# Altium PCB lab_1_pankov_usb_rs232.PcbDoc
Units mm, origin at the board's own origin, x right, y up, seen from the top; angles counter-clockwise.
Board outline 60 x 34 mm, 4 copper layers (Top Layer, Signal Layer 1, Signal Layer 2, Bottom Layer), stack 1.522 mm thick; 29 components, 24 nets, 115 pads, 88 vias.
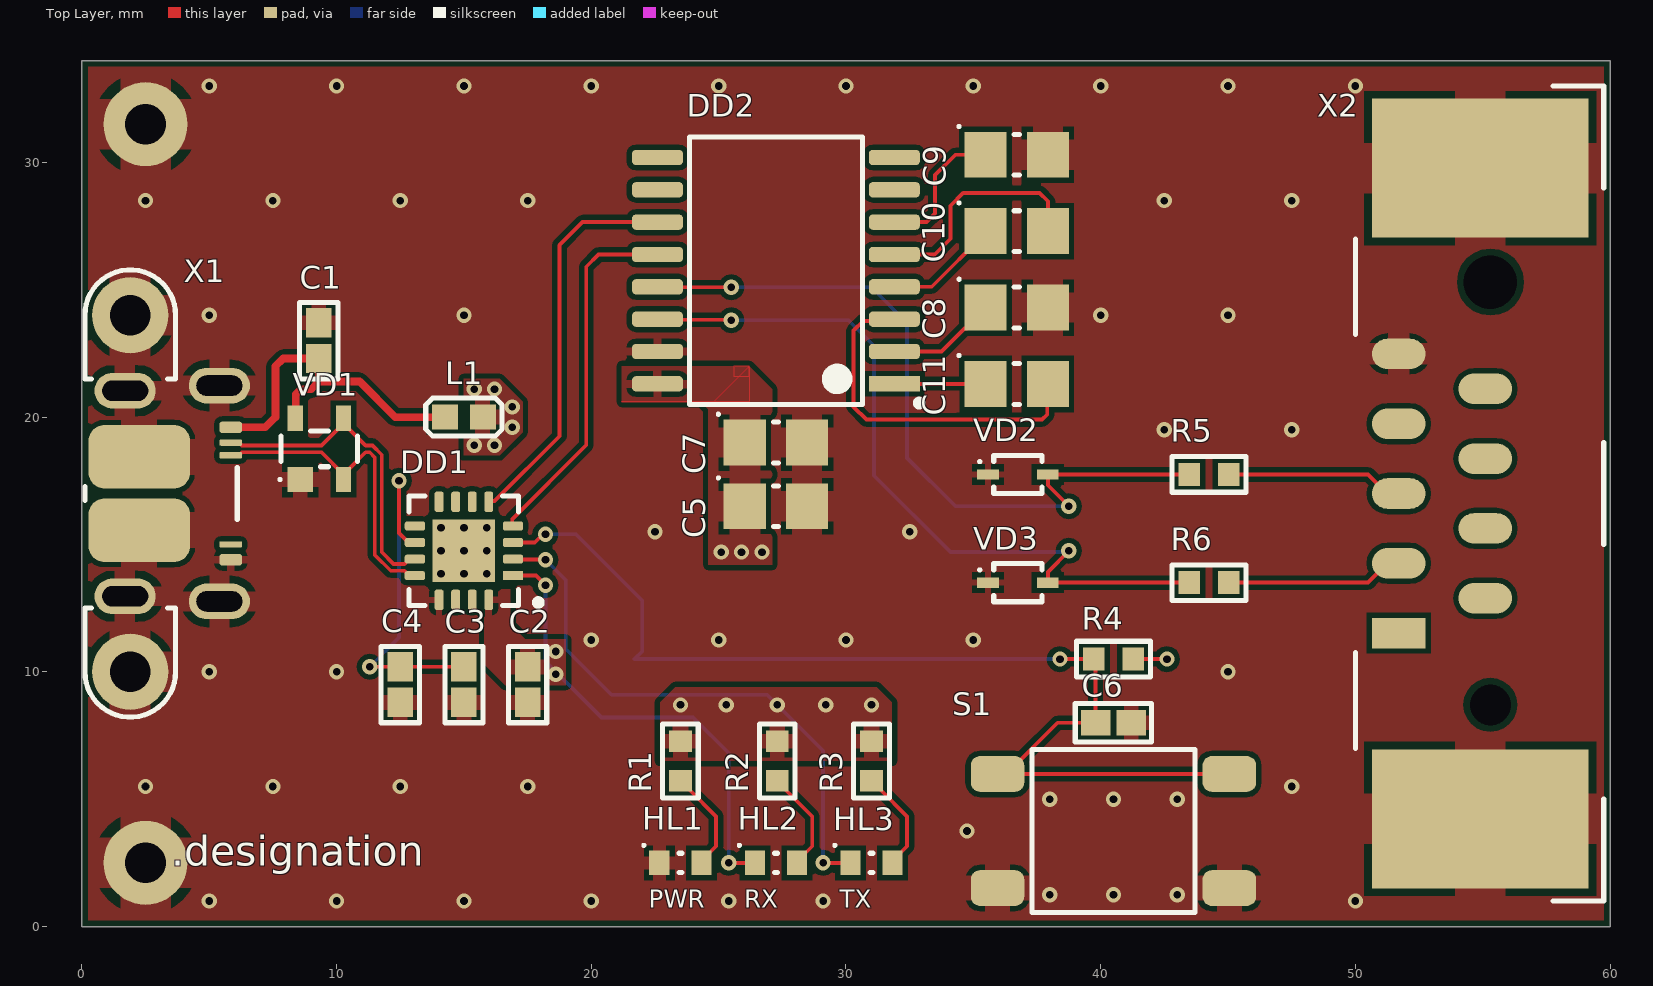
[diagram p0: Top Layer view]
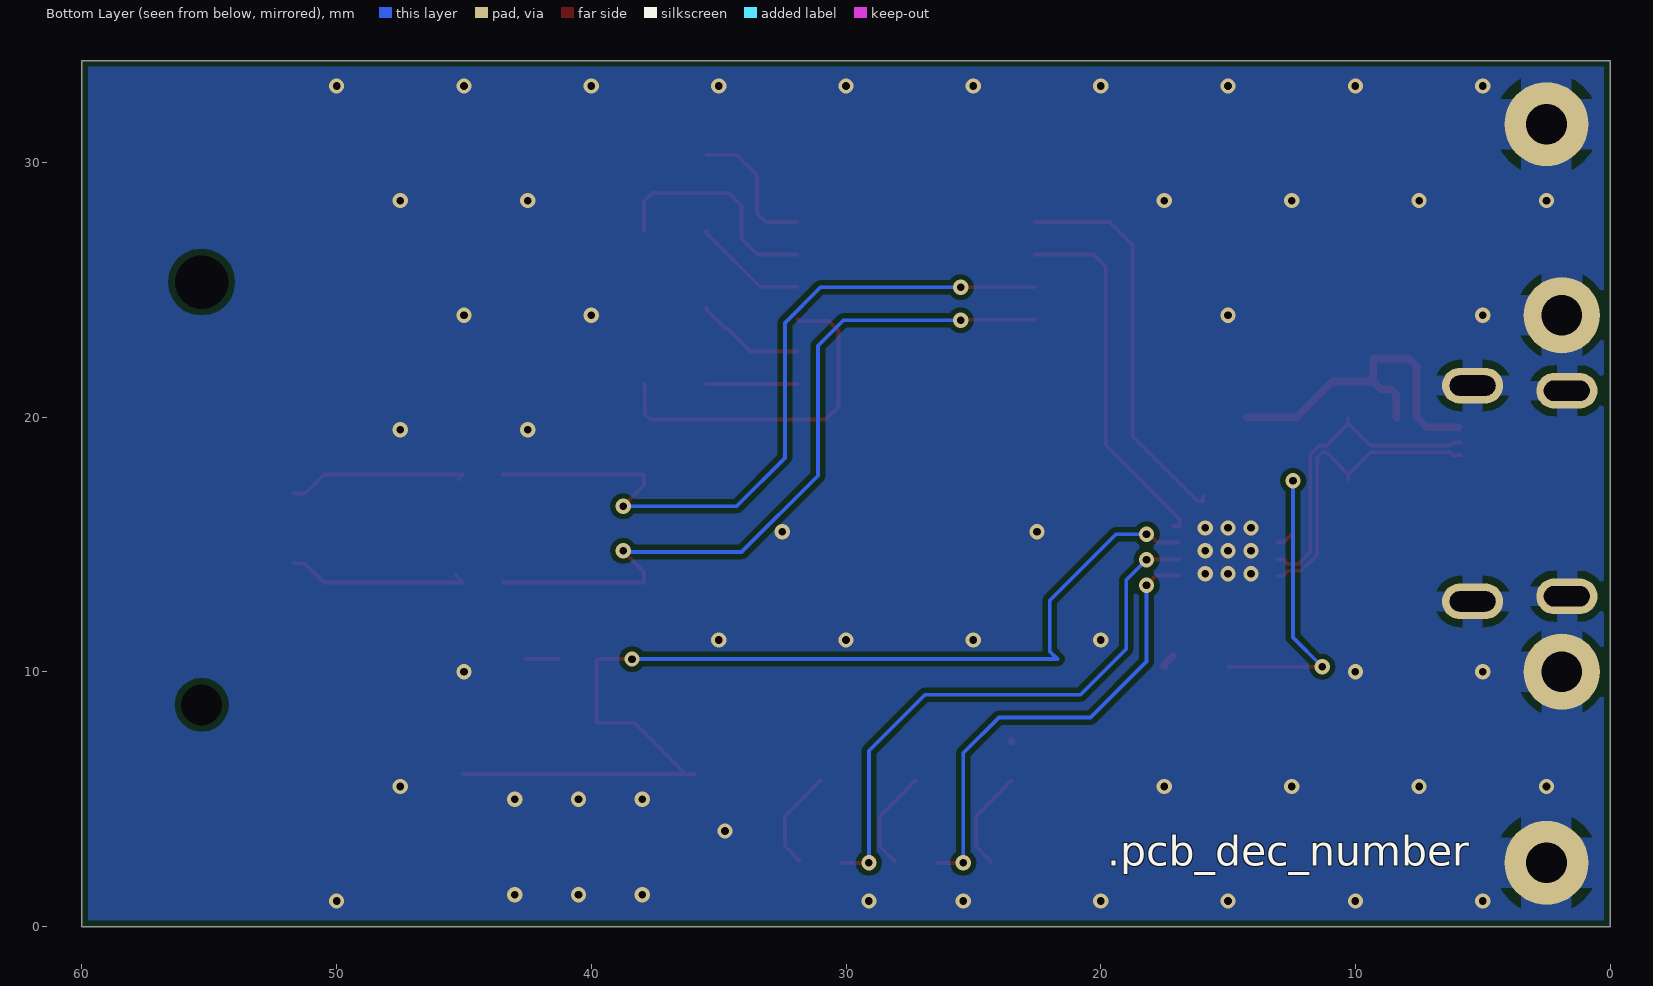
[diagram p1: Bottom Layer view, seen from below]
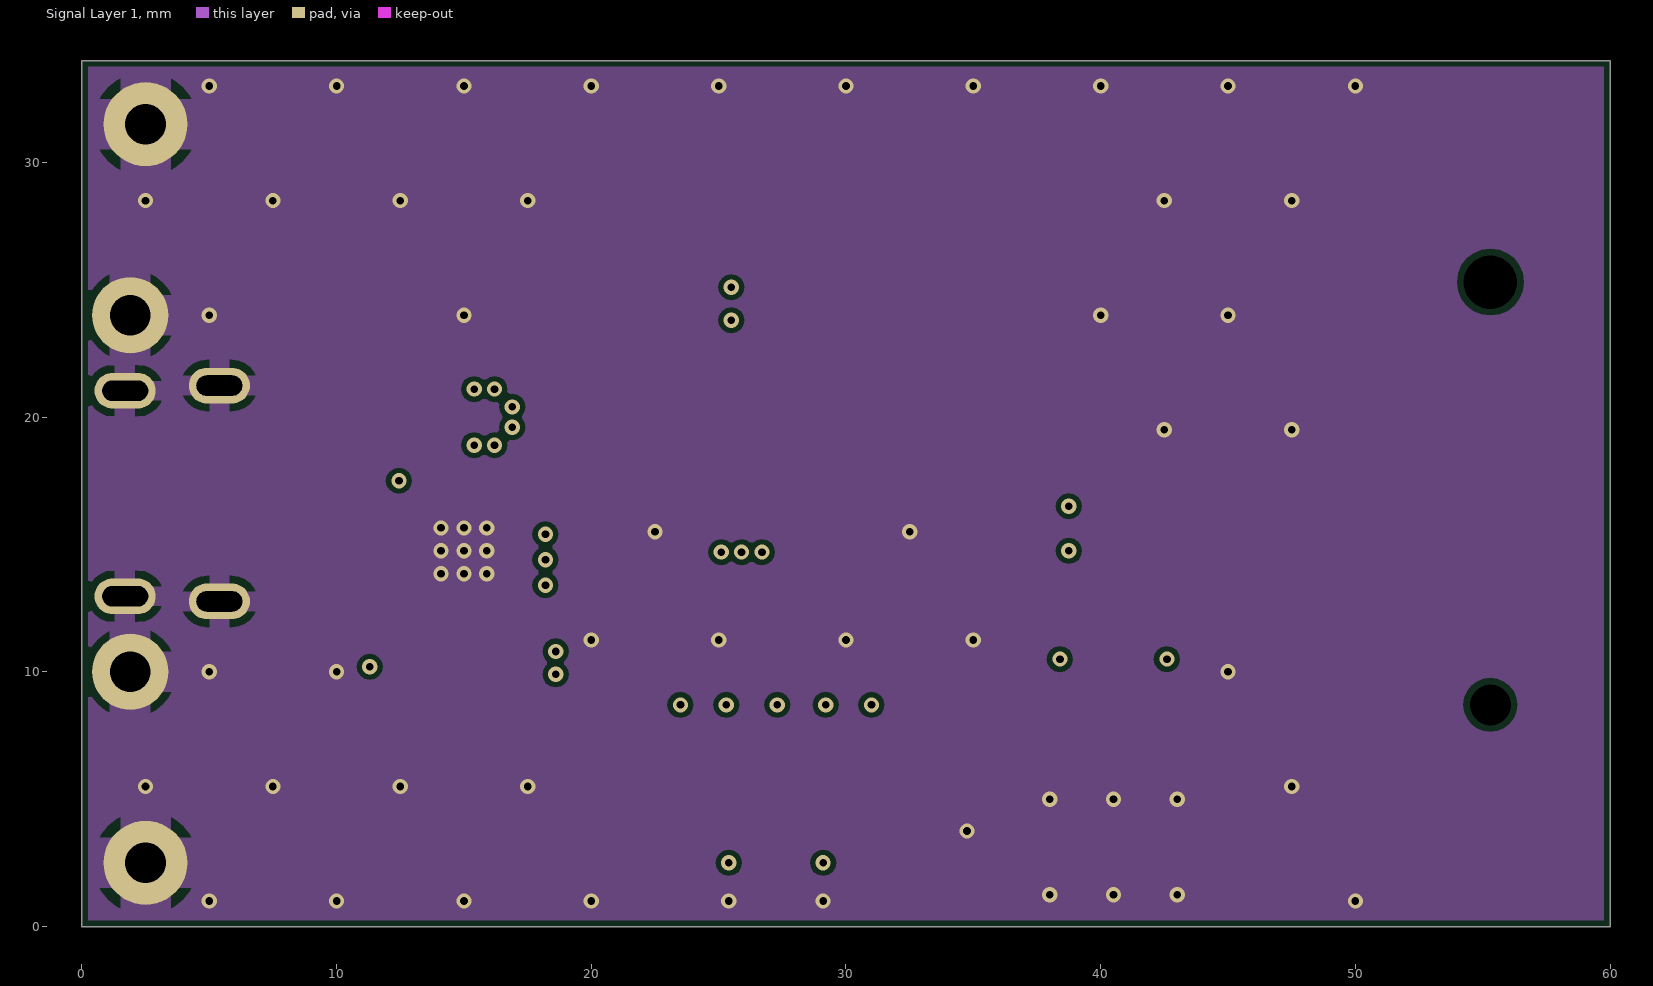
[diagram p2: Signal Layer 1]
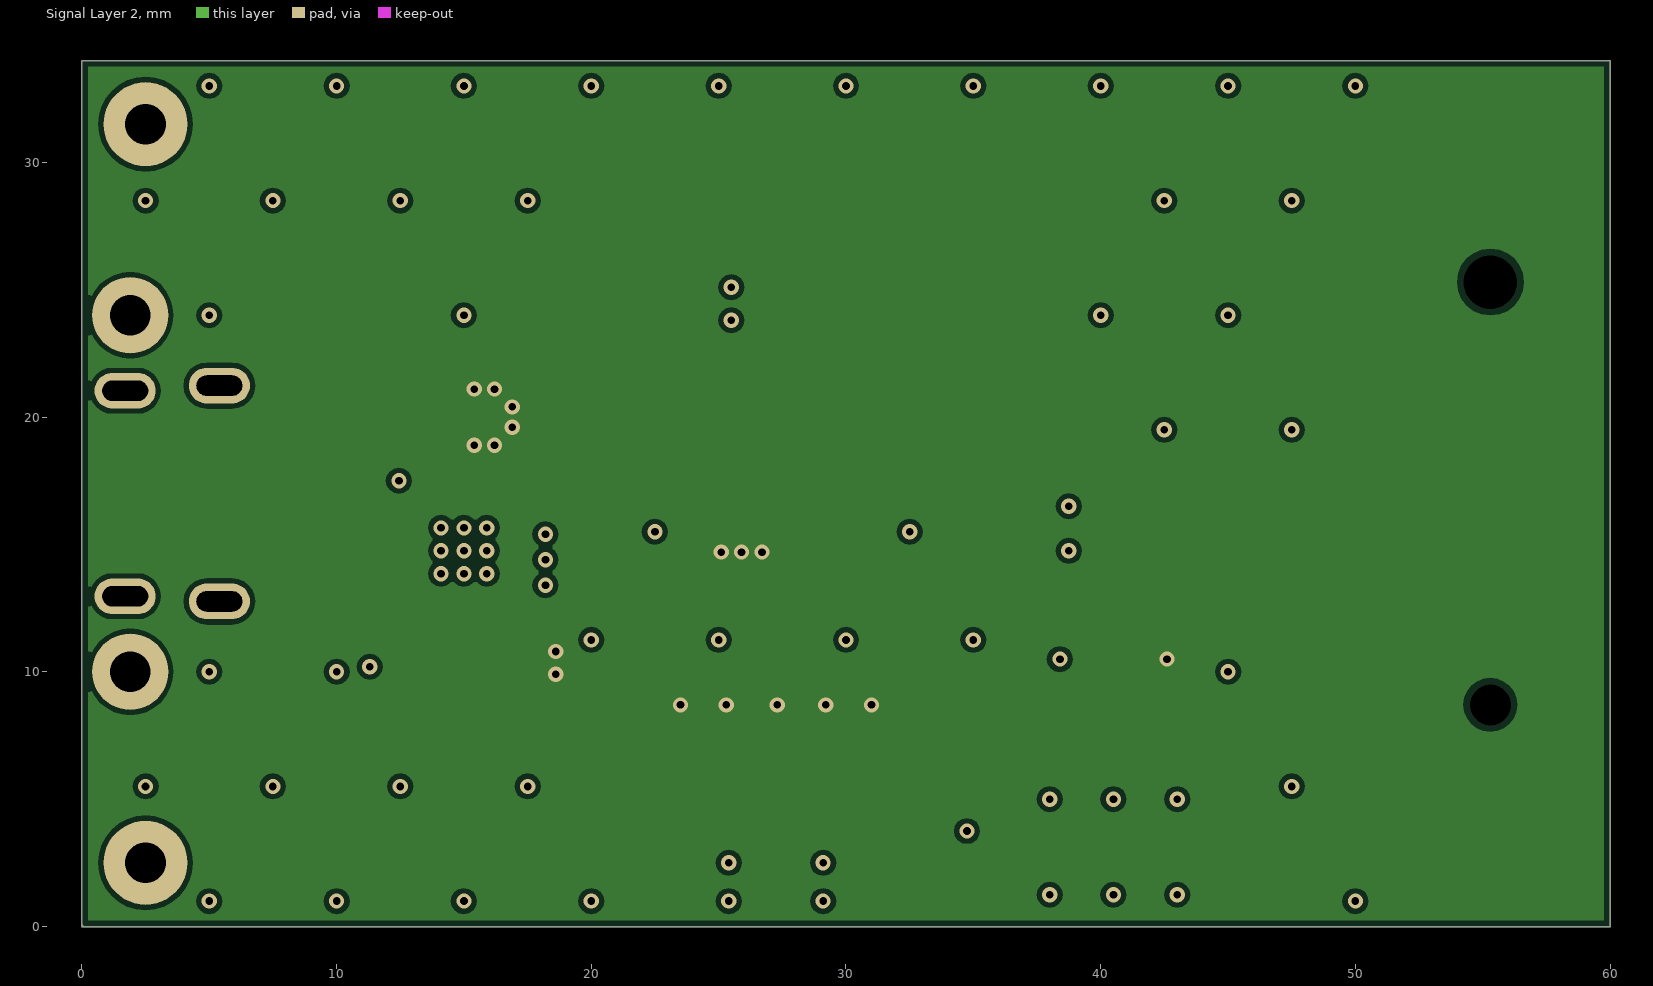
[diagram p3: Signal Layer 2]
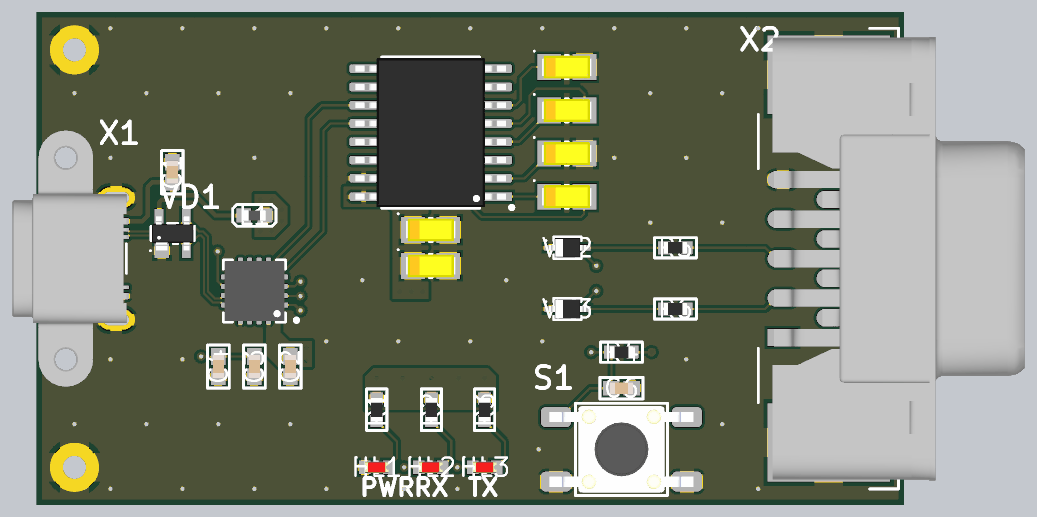
[diagram p4: 3D render of the assembled board from above, using the file's embedded part models]

## Layer stack, top to bottom
Top Solder: solder mask 0.0102, Solder Resist, Dk 3.5
Top Layer: signal copper 0.018
Prepreg 1: prepreg 0.125, FR4 HiTg170, Dk 5.07
Signal Layer 1: signal copper 0.018
Core 1: core 1.2, FR4, Dk 4.6
Signal Layer 2: signal copper 0.018
Prepreg 2: prepreg 0.125, FR4 HiTg170, Dk 5.07
Bottom Layer: signal copper 0.018
Bottom Solder: solder mask 0.0102, Solder Resist, Dk 3.5

## Board outline
0,0 60,0 60,34 0,34

## Design rules (kind name [scope] priority, off if disabled: settings)
AcuteAngle min_acute_angle [OnCopper] p1: minimum=3.50000000000000E+0001 checktracksonly=FALSE // Минимальный угол между примитивами топологии
BoardOutlineClearance board_outline_clearance_std [NOT (OnLayer('Bottom Overlay') OR OnLayer('Top Overlay'))] p1: gap=0.25 ignorepadtopadclearanceinfootprint=FALSE except(0: Arc-SplitContinuation Track-SplitContinuation SMDPad-SplitContinuation THPad-SplitContinuation Via-SplitContinuation Fill-SplitContinuation Poly-SplitContinuation Region-SplitContinuation Text-SplitContinuation) // Отступ элементов топологии от края фрезеруемой печатной платы
Clearance clearance_outer_18um_std [OnTopLayer OR OnBottomLayer] p1: gap=0.125 ignorepadtopadclearanceinfootprint=TRUE except(0.2: Arc-Fill Arc-Poly Track-Fill Track-Poly SMDPad-SMDPad SMDPad-Fill SMDPad-Poly THPad-Fill THPad-Poly Via-Fill Via-Poly Fill-Fill Fill-Poly Poly-Poly Poly-Region Poly-Text; 0.25: Arc-Hole Track-Hole SMDPad-Hole THPad-Hole Via-Hole Fill-Hole Poly-Hole Region-Hole Text-Hole) // Зазоры на внешних слоях
Clearance clearance_inner_18um_std [NOT (OnTopLayer Or OnBottomLayer)] p2: gap=0.125 ignorepadtopadclearanceinfootprint=FALSE except(0.2: Arc-Fill Arc-Poly Track-Fill Track-Poly SMDPad-SMDPad SMDPad-Fill SMDPad-Poly THPad-Fill THPad-Poly Via-Fill Via-Poly Fill-Fill Fill-Poly Poly-Poly Poly-Region Poly-Text; 0.25: Arc-Hole Track-Hole SMDPad-Hole THPad-Hole Via-Hole Fill-Hole Poly-Hole Region-Hole Text-Hole) // Зазоры на внутренних слоях
ComponentClearance [All] p1: gap=0 collisioncheckmode=3 verticalgap=0 showdistances=FALSE
DiffPairsRouting diff_pairs_routing [All] p1: maxlimit=0.254 minlimit=0.127 mostfreqgap=0.254 toplayer_maxgap=0.127 toplayer_prefgap=0.127 toplayer_minwidth=0.143 toplayer_maxwidth=0.143 toplayer_prefwidth=0.143 midlayer1_minwidth=0.381 midlayer1_maxwidth=0.381 midlayer1_prefwidth=0.381 midlayer2_minwidth=0.381 midlayer2_maxwidth=0.381 midlayer2_prefwidth=0.381 bottomlayer_maxgap=0.127 bottomlayer_prefgap=0.127 bottomlayer_minwidth=0.143 bottomlayer_maxwidth=0.143 bottomlayer_prefwidth=0.143 impedanceprofiledriven=TRUE maxuncoupledlength=12.7 // Правила трассировки дифференциальных пар
HoleSize min_hole_size_std [IsPad] p1: absolutevalues=TRUE maxlimit=5.9 minlimit=0.6 maxpercent=80.000 minpercent=20.000 // Диаметр межслойного переходного отверстия
HoleSize min_hole_size_via_std [IsVia] p2: absolutevalues=TRUE maxlimit=5.9 minlimit=0.3 maxpercent=80.000 minpercent=20.000 // Минимальный диаметр монтажного отверстия
HoleToHoleClearance hole_to_hole_clearance_std [All] p1: gap=0.2 allowstackedmicrovias=FALSE // Минимальное расстояние между краями двух отверстий
MinimumAnnularRing min_via_ar_std [All] p1: minimumring=0.15 // Поясок площадки переходного отверстия (Annular ring VIA)
MinimumAnnularRing min_pad_ar_std [All] p2: minimumring=0.2 // Поясок монтажной контактной площадки (Annular ring PAD)
MinimumSolderMaskSliver min_solder_mask_bridge_std [All] p1: minsoldermaskwidth=0.15 // Мнимальная ширина масочного мостика
PlaneClearance plane_clearance_18um_std [All] p1: clearance=0.2 // Отступ полигона (для слоя plane) от элементов топологии
PlaneConnect [All] p1: planeconnectstyle=Relief reliefexpansion=0.5 reliefentries=4 reliefconductorwidth=0.2 reliefairgap=0.2
PolygonConnect poly_connect_to_pad<=0.3 [(AsMM(PadXSize_AllLayers)<=0.301) or (AsMM(PadYSize_AllLayers)<=0.301)] p1: thpad.connectstyle=Relief thpad.reliefconductorwidth=0.2 thpad.reliefentries=4 thpad.polygonreliefangle="90 Angle" thpad.airgapwidth=0.2 smdpad.connectstyle=Relief smdpad.reliefconductorwidth=0.2 smdpad.reliefentries=4 smdpad.polygonreliefangle="90 Angle" smdpad.airgapwidth=0.2 via.connectstyle=Direct via.reliefconductorwidth=0.254 via.reliefentries=4 via.polygonreliefangle="90 Angle" via.airgapwidth=0.254 // Правила подключения полигонов для падов от 0,3мм и меньше
PolygonConnect poly_connect_to_pad<=0.4 [(AsMM(PadXSize_AllLayers)<=0.401) or (AsMM(PadYSize_AllLayers)<=0.401)] p2: thpad.connectstyle=Relief thpad.reliefconductorwidth=0.26 thpad.reliefentries=4 thpad.polygonreliefangle="90 Angle" thpad.airgapwidth=0.2 smdpad.connectstyle=Relief smdpad.reliefconductorwidth=0.26 smdpad.reliefentries=4 smdpad.polygonreliefangle="90 Angle" smdpad.airgapwidth=0.2 via.connectstyle=Direct via.reliefconductorwidth=0.254 via.reliefentries=4 via.polygonreliefangle="90 Angle" via.airgapwidth=0.254 // Правила подключения полигонов для падов от 0,4 и меньше
PolygonConnect poly_connect_to_pad<=0.6 [(AsMM(PadXSize_AllLayers)<=0.601) or (AsMM(PadYSize_AllLayers)<=0.601)] p3: thpad.connectstyle=Relief thpad.reliefconductorwidth=0.33 thpad.reliefentries=4 thpad.polygonreliefangle="90 Angle" thpad.airgapwidth=0.2 smdpad.connectstyle=Relief smdpad.reliefconductorwidth=0.33 smdpad.reliefentries=4 smdpad.polygonreliefangle="90 Angle" smdpad.airgapwidth=0.2 via.connectstyle=Direct via.reliefconductorwidth=0.254 via.reliefentries=4 via.polygonreliefangle="90 Angle" via.airgapwidth=0.254 // Правила подключения полигонов для падов от 0,6мм и меньше
PolygonConnect poly_connect_to_pad<=0.7 [(AsMM(PadXSize_AllLayers)<=0.701) or (AsMM(PadYSize_AllLayers)<=0.701)] p4: thpad.connectstyle=Relief thpad.reliefconductorwidth=0.46 thpad.reliefentries=4 thpad.polygonreliefangle="90 Angle" thpad.airgapwidth=0.2 smdpad.connectstyle=Relief smdpad.reliefconductorwidth=0.46 smdpad.reliefentries=4 smdpad.polygonreliefangle="90 Angle" smdpad.airgapwidth=0.2 via.connectstyle=Direct via.reliefconductorwidth=0.254 via.reliefentries=4 via.polygonreliefangle="90 Angle" via.airgapwidth=0.254 // Правила подключения полигонов для падов от 0,7мм и меньше
PolygonConnect poly_connect_to_pad<=0.8 [(AsMM(PadXSize_AllLayers)<=0.8)or(AsMM(PadYSize_AllLayers)<=0.8)] p5: thpad.connectstyle=Relief thpad.reliefconductorwidth=0.53 thpad.reliefentries=4 thpad.polygonreliefangle="90 Angle" thpad.airgapwidth=0.3 smdpad.connectstyle=Relief smdpad.reliefconductorwidth=0.53 smdpad.reliefentries=4 smdpad.polygonreliefangle="90 Angle" smdpad.airgapwidth=0.2 via.connectstyle=Direct via.reliefconductorwidth=0.254 via.reliefentries=4 via.polygonreliefangle="90 Angle" via.airgapwidth=0.254 // Правила подключения полигонов для падов от 0,8мм и меньше
PolygonConnect poly_connect_to_pad<=1 [(AsMM(PadXSize_AllLayers)<=1.01)or(AsMM(PadYSize_AllLayers)<=1.01)] p6: thpad.connectstyle=Relief thpad.reliefconductorwidth=0.6 thpad.reliefentries=4 thpad.polygonreliefangle="90 Angle" thpad.airgapwidth=0.3 smdpad.connectstyle=Relief smdpad.reliefconductorwidth=0.6 smdpad.reliefentries=4 smdpad.polygonreliefangle="90 Angle" smdpad.airgapwidth=0.2 via.connectstyle=Direct via.reliefconductorwidth=0.254 via.reliefentries=4 via.polygonreliefangle="90 Angle" via.airgapwidth=0.254 // Правила подключения полигонов для падов от 1мм и меньше
PolygonConnect poly_connect_to_pad<=1.3 [(AsMM(PadXSize_AllLayers)<=1.31)or(AsMM(PadYSize_AllLayers)<=1.31)] p7: thpad.connectstyle=Relief thpad.reliefconductorwidth=0.66 thpad.reliefentries=4 thpad.polygonreliefangle="90 Angle" thpad.airgapwidth=0.3 smdpad.connectstyle=Relief smdpad.reliefconductorwidth=0.86 smdpad.reliefentries=4 smdpad.polygonreliefangle="90 Angle" smdpad.airgapwidth=0.2 via.connectstyle=Direct via.reliefconductorwidth=0.254 via.reliefentries=4 via.polygonreliefangle="90 Angle" via.airgapwidth=0.254 // Правила подключения полигонов для падов от 1,3мм и меньше
PolygonConnect poly_connect_to_pad<=1.6 [(AsMM(PadXSize_AllLayers)<=1.61)or(AsMM(PadYSize_AllLayers)<=1.61)] p8: thpad.connectstyle=Relief thpad.reliefconductorwidth=0.8 thpad.reliefentries=4 thpad.polygonreliefangle="90 Angle" thpad.airgapwidth=0.3 smdpad.connectstyle=Relief smdpad.reliefconductorwidth=1 smdpad.reliefentries=4 smdpad.polygonreliefangle="90 Angle" smdpad.airgapwidth=0.2 via.connectstyle=Direct via.reliefconductorwidth=0.254 via.reliefentries=4 via.polygonreliefangle="90 Angle" via.airgapwidth=0.254 // Правила подключения полигонов для падов от 1,6мм и меньше
PolygonConnect poly_connect_to_pad<=1.8 [(AsMM(PadXSize_AllLayers)<=1.8)or(AsMM(PadYSize_AllLayers)<=1.8)] p9: thpad.connectstyle=Relief thpad.reliefconductorwidth=1 thpad.reliefentries=4 thpad.polygonreliefangle="90 Angle" thpad.airgapwidth=0.3 smdpad.connectstyle=Relief smdpad.reliefconductorwidth=1.2 smdpad.reliefentries=4 smdpad.polygonreliefangle="90 Angle" smdpad.airgapwidth=0.2 via.connectstyle=Direct via.reliefconductorwidth=0.254 via.reliefentries=4 via.polygonreliefangle="90 Angle" via.airgapwidth=0.254 // Правила подключения полигонов для падов от 1,8мм и меньше
PolygonConnect poly_connect_to_pad<=2 [(AsMM(PadXSize_AllLayers)<=2.01)or(AsMM(PadYSize_AllLayers)<=2.01)] p10: thpad.connectstyle=Relief thpad.reliefconductorwidth=1.1 thpad.reliefentries=4 thpad.polygonreliefangle="90 Angle" thpad.airgapwidth=0.3 smdpad.connectstyle=Relief smdpad.reliefconductorwidth=1.4 smdpad.reliefentries=4 smdpad.polygonreliefangle="90 Angle" smdpad.airgapwidth=0.2 via.connectstyle=Direct via.reliefconductorwidth=0.254 via.reliefentries=4 via.polygonreliefangle="90 Angle" via.airgapwidth=0.254 // Правила подключения полигонов для падов от 2мм и меньше
PolygonConnect poly_connect_to_pad<=2.3 [(AsMM(PadXSize_AllLayers)<=2.31)or(AsMM(PadYSize_AllLayers)<=2.31)] p11: thpad.connectstyle=Relief thpad.reliefconductorwidth=1.2 thpad.reliefentries=4 thpad.polygonreliefangle="90 Angle" thpad.airgapwidth=0.3 smdpad.connectstyle=Relief smdpad.reliefconductorwidth=1.4 smdpad.reliefentries=4 smdpad.polygonreliefangle="90 Angle" smdpad.airgapwidth=0.2 via.connectstyle=Direct via.reliefconductorwidth=0.254 via.reliefentries=4 via.polygonreliefangle="90 Angle" via.airgapwidth=0.254 // Правила подключения полигонов для падов от 2,3мм и меньше
PolygonConnect poly_connect_to_pad<=2.5 [(AsMM(PadXSize_AllLayers)<=2.51)or(AsMM(PadYSize_AllLayers)<=2.51)] p12: thpad.connectstyle=Relief thpad.reliefconductorwidth=1.2 thpad.reliefentries=4 thpad.polygonreliefangle="90 Angle" thpad.airgapwidth=0.3 smdpad.connectstyle=Relief smdpad.reliefconductorwidth=1.4 smdpad.reliefentries=4 smdpad.polygonreliefangle="90 Angle" smdpad.airgapwidth=0.2 via.connectstyle=Direct via.reliefconductorwidth=0.254 via.reliefentries=4 via.polygonreliefangle="90 Angle" via.airgapwidth=0.254 // Правила подключения полигонов для падов от 2,5мм и меньше
PolygonConnect poly_connect_to_pad<=2.7 [(AsMM(PadXSize_AllLayers)<=2.71)or(AsMM(PadYSize_AllLayers)<=2.71)] p13: thpad.connectstyle=Relief thpad.reliefconductorwidth=1.4 thpad.reliefentries=4 thpad.polygonreliefangle="90 Angle" thpad.airgapwidth=0.3 smdpad.connectstyle=Relief smdpad.reliefconductorwidth=1.6 smdpad.reliefentries=4 smdpad.polygonreliefangle="90 Angle" smdpad.airgapwidth=0.2 via.connectstyle=Direct via.reliefconductorwidth=0.254 via.reliefentries=4 via.polygonreliefangle="90 Angle" via.airgapwidth=0.254 // Правила подключения полигонов для падов от 2,7мм и меньше
PolygonConnect poly_connect_to_pad<=3 [(AsMM(PadXSize_AllLayers)<=3.01)or(AsMM(PadYSize_AllLayers)<=3.01)] p14: thpad.connectstyle=Relief thpad.reliefconductorwidth=1.6 thpad.reliefentries=4 thpad.polygonreliefangle="90 Angle" thpad.airgapwidth=0.3 smdpad.connectstyle=Relief smdpad.reliefconductorwidth=1.8 smdpad.reliefentries=4 smdpad.polygonreliefangle="90 Angle" smdpad.airgapwidth=0.2 via.connectstyle=Direct via.reliefconductorwidth=0.254 via.reliefentries=4 via.polygonreliefangle="90 Angle" via.airgapwidth=0.254 // Правила подключения полигонов для падов от 3мм и меньше
PolygonConnect poly_connect_to_pad<=7 [(AsMM(PadXSize_AllLayers)<7.01)or(AsMM(PadYSize_AllLayers)<=7.01)] p15: thpad.connectstyle=Relief thpad.reliefconductorwidth=2 thpad.reliefentries=4 thpad.polygonreliefangle="90 Angle" thpad.airgapwidth=0.4 smdpad.connectstyle=Relief smdpad.reliefconductorwidth=2 smdpad.reliefentries=4 smdpad.polygonreliefangle="90 Angle" smdpad.airgapwidth=0.3 via.connectstyle=Direct via.reliefconductorwidth=0.254 via.reliefentries=4 via.polygonreliefangle="90 Angle" via.airgapwidth=0.254 // Правила подключения полигонов для падов от 7мм и меньше
PolygonConnect poly_connect_to_pad [All] p16: thpad.connectstyle=Relief thpad.reliefconductorwidth=0.25 thpad.reliefentries=4 thpad.polygonreliefangle="90 Angle" thpad.airgapwidth=0.2 smdpad.connectstyle=Relief smdpad.reliefconductorwidth=0.25 smdpad.reliefentries=4 smdpad.polygonreliefangle="90 Angle" smdpad.airgapwidth=0.2 via.connectstyle=Direct via.reliefconductorwidth=0.25 via.reliefentries=4 via.polygonreliefangle="90 Angle" via.airgapwidth=0.2 // Правила подключения полигонов общие
RoutingCorners [All] p1 off: cornerstyle=45-Degree minsetback=2.5 maxsetback=2.5
RoutingVias [All] p1: holewidth=0.3 width=0.6 viastyle="Through Hole" minholewidth=0.3 minwidth=0.6 maxholewidth=5.9 maxwidth=6.4
SilkToSilkClearance silk_to_silk_clearance_std [All] p1 off: silktosilkclearance=0.15 // Отступ текста шелкографии от других примитивов шелкографии
SilkToSolderMaskClearance silk_to_solder_mask_clearance_std [IsPad] p1 off: minsilkscreentomaskgap=0.15 clearancetoexposedcopper=FALSE // Минимальное расстояние между элементами шелкографии и вскрытой медью
SolderMaskExpansion solder_mask_expansion_std [All] p1: expansion=0.05 // Припуск паяльной масски
UnRoutedNet [All] p1: checkbadconnections=TRUE
Width width_18um_std [All] p1: maxlimit=10 minlimit=0.125 preferedwidth=0.15 checkconnectedcopper=TRUE // Ширина проводников (общая)
19 further rules are at their usual default settings.

## Classes and differential pairs
differential pair USB_D: +USB_D_P -USB_D_N

## Components (designator, comment, footprint, x,y, rotation, side; value= is the part's Value field where it differs from the comment)
C1 "0,1 мк" C0603 9.3,23 r90 top
C2 "4,7 мк" C0603 17.5,9.5 r270 top
C3 "2,2 мк" C0603 15,9.5 r270 top
C4 "0,22 мк" C0603 12.5,9.5 r270 top
C5 "1 мк" C1206POLAR 27.25,16.5 r0 top
C6 "0,1 мк" C0603 40.5,8 r0 top
C7 "0,1 мк" C1206POLAR 27.25,19 r0 top
C8 "1 мк" C1206POLAR 36.7,24.3 r0 top
C9 "1 мк" C1206POLAR 36.7,30.3 r0 top
C10 "1 мк" C1206POLAR 36.7,27.3 r0 top
C11 "1 мк" C1206POLAR 36.7,21.3 r0 top
DD1 "MCP2221A-I/ML" QFN-16-4X4 15,14.75 r180 top
DD2 "MAX232DR" SOIC-16 27.25,25.75 r180 top
HL1 "TLMS1000-GS08" HL0603 23.5,2.5 r0 top
HL2 "TLMS1000-GS08" HL0603 27.25,2.5 r0 top
HL3 "TLMS1000-GS08" HL0603 31,2.5 r0 top
L1 "BLM18PG221SN1D" BLM-2-0603 15,20 r0 top
R1 "220" R0603 23.5,6.5 r270 top
R2 "220" R0603 27.3,6.5 r270 top
R3 "220" R0603 31,6.5 r270 top
R4 "10 к" R0603 40.5,10.5 r180 top
R5 "22" R0603 44.25,17.75 r0 top
R6 "22" R0603 44.25,13.5 r0 top
S1 "FSM4JSMA" FSM4JSMA 40.5,3.75 r180 top
VD1 "TPD2E001DZDR" SOT143-4 9.325,18.75 r90 top
VD2 "SD12C-01FTG" SOD323 36.75,17.75 r0 top
VD3 "SD12C-01FTG" SOD323 36.75,13.5 r0 top
X1 "2108877-1" 2108877-1 2.15,17 r90 top
X2 "1-1740194-2" 1-1740194-2 59.5,17 r270 top

## Footprints (in the part's own frame and the unit in brackets; to place one, negate y for a bottom-side part, rotate by r counter-clockwise, add the part's x,y. Pads: shape width x height; smd on the part's side, far side on the other; paste and mask are expansions set on the pad)
1-1740194-2 [mm]
  rect 1.2x2.1 smd: 1(5.48,-7.8)
  oval 1.2x2.1 smd: 2(2.74,-7.8) 3(0,-7.8) 4(-2.74,-7.8) 5(-5.48,-7.8) 6(4.11,-4.4) 7(1.37,-4.4) 8(-1.37,-4.4) 9(-4.11,-4.4)
  rect 5.45x8.5 smd: TP1(-12.775,-4.6) TP1(12.775,-4.6)
  round 0 hole 2.1: ""(-8.3,-4.2)
  round 0 hole 1.6: ""(8.3,-4.2)
  silkscreen extent -16,-9.5 16,0.25, body extent -15.4,-8.5 15.4,9, height 9.87
2108877-1 [mm]
  rrect50% 0.45x0.9 smd: 1(2.6,-3.696) 5(-2.6,-3.696)
  rrect50% 0.25x0.9 smd: 2(2,-3.696) 3(1.5,-3.696) 4(-2,-3.696)
  round 3 hole 1.6: TP1(-7,0.25) TP1(7,0.25)
  oval 1.4x2.4 hole 0.8 slot 1.8 at 90 deg mask+0.102: TP1(-4.235,-3.25) TP1(-4.035,0.45) TP1(4.035,0.45) TP1(4.235,-3.25)
  rrect50% 2.5x3.98 smd: TP1(-1.441,-0.104) TP1(1.441,-0.104)
  silkscreen extent -8.78,-3.95 8.78,2.03, body extent -8.9,-3.95 8.9,3.95, height 3.39
BLM-2-0603 [mm] "Chip Inductor, 2-Leads, Body 1,60x0,80mm, IPC Medium Density"
  rect 1.02x0.98 smd: 1(-0.74,0) 2(0.74,0)
  silkscreen extent -1.5,-0.75 1.5,0.75, body extent -0.8,-0.37 0.8,0.38, height 0.8
C0603 [mm] "Chip Capacitor, 2-Leads, Body 1,60x0,80mm, IPC Medium Density"
  rect 1.15x1 smd: 1(-0.7,0) 2(0.7,0)
  silkscreen extent -1.5,-0.75 1.5,0.75, body extent -0.8,-0.4 0.8,0.4, height 0.8
C1206POLAR [mm] "Chip Capacitor, 2-Leads, Body 3,20x1,60mm, IPC Medium Density"
  rect 1.65x1.8 smd: 1(-1.225,0) 2(1.225,0)
  silkscreen extent -2.31,-0.8 0.1,1.16, body extent -1.73,-0.8 1.73,0.8, height 1.65
FSM4JSMA [mm]
  rrect50% 2.1x1.4 smd: 1(-4.55,2.24) 1(4.55,2.24) 2(-4.55,-2.24) 2(4.55,-2.24)
  silkscreen extent -3.2,-3.2 3.2,3.2, body extent -5,-3 5,3, height 5.13
HL0603 [mm] "Chip Diode, 2-Leads, Body 1,60x0,80mm, IPC Medium Density"
  rect 0.8x0.95 smd: 1(-0.825,0) 2(0.825,0)
  silkscreen extent -1.49,-0.38 0.05,0.74, body extent -0.81,-0.4 0.81,0.4, height 0.6
QFN-16-4X4 [mm] "QFN, 16-Leads, Body 4,00x4,00mm, Pitch 0,65mm, Thermal Pad 2,65x2,65mm, IPC Medium Density"
  rect 2.45x2.45 smd: 0(0,0)
  rect 0.8x0.35 smd: 1(-1.925,0.975)
  rrect50% 0.8x0.35 smd: 2(-1.925,0.325) 3(-1.925,-0.325) 4(-1.925,-0.975) 9(1.925,-0.975) 10(1.925,-0.325) 11(1.925,0.325) 12(1.925,0.975)
  rrect50% 0.35x0.8 smd: 5(-0.975,-1.925) 6(-0.325,-1.925) 7(0.325,-1.925) 8(0.975,-1.925) 13(0.975,1.925) 14(0.325,1.925) 15(-0.325,1.925) 16(-0.975,1.925)
  silkscreen extent -3.05,-2.15 2.15,2.16, body extent -2.08,-2.08 2.09,2.09, height 0.85
R0603 [mm] "Chip Resistor, 2-Leads, Body 1,60x0,80mm, IPC Medium Density"
  rect 0.85x0.9 smd: 1(-0.775,0) 2(0.775,0)
  silkscreen extent -1.45,-0.7 1.45,0.7, body extent -0.8,-0.4 0.8,0.4, height 0.45
SOD323 [mm] "SODFL, 2-Leads, Body 1,30x2,57mm, IPC Medium Density"
  rect 0.85x0.4 smd: 1(-1.175,0) 2(1.175,0)
  silkscreen extent -1.55,-0.75 0.95,0.75, body extent -1.3,-0.67 1.3,0.68, height 1.1
SOIC-16 [mm] "SOIC, 16-Leads, Body 10,30x7,50mm, Pitch 1,27mm, IPC Medium Density"
  rect 2x0.6 smd: 1(-4.65,4.445)
  rrect50% 2x0.6 smd: 2(-4.65,3.175) 3(-4.65,1.905) 4(-4.65,0.635) 5(-4.65,-0.635) 6(-4.65,-1.905) 7(-4.65,-3.175) 8(-4.65,-4.445) 9(4.65,-4.445) 10(4.65,-3.175) 11(4.65,-1.905) 12(4.65,-0.635) 13(4.65,0.635) 14(4.65,1.905) 15(4.65,3.175) 16(4.65,4.445)
  silkscreen extent -5.75,-5.25 3.4,5.32, body extent -5.24,-5.17 5.24,5.18, height 2.65
SOT143-4 [mm] "SOT143, 4-Leads, Body 2,92x2,37mm, Pitch 1,90mm, IPC Medium Density"
  rect 1x1 smd: 1(-1.2,0.75)
  rect 1x0.6 smd: 2(-1.2,-0.95) 3(1.2,-0.95) 4(1.2,0.95)
  silkscreen extent -1.25,-1.5 0.7,1.6, body extent -1.18,-1.45 1.18,1.45, height 1.22

## Part data
C1 C6: library part c0018, "=Описание", HelpURL=https://www.yageo.com/upload/media/product/products/datasheet/mlcc/UPY-GPHC_X7R_6.3V-to-50V_20.pdf, id=c0018, Корпус=0603, Наименование=CC0603JRX7R9BB104, Напряжение="50 В", Номинал="0,1 мк", Номинальное напряжение="50 В", Описание="Конденсатор чип 0603 0,1 мкФ 50 В ±5 %", Отклонение="±5 %", Производитель="YAGEO Corp.", Рабочие температуры="от -55 °С до +125 °С", Фамилия=Ларионов
C2: library part c0029, "=Описание", HelpURL=https://www.yageo.com/upload/media/product/productsearch/datasheet/mlcc/UPY-GPHC_X5R_4V-to-50V_26.pdf, id=c0029, Корпус=0603, Наименование=CC0603KRX5R8BB475, Напряжение="50 В", Номинал="4,7 мк", Номинальное напряжение="25 В", Описание="Конденсатор чип 0603 4,7 мкФ 25 В ±10 %", Отклонение="±10 %", Производитель="YAGEO Corp.", Рабочие температуры="от -55 °С до +85 °С", Фамилия=Ларионов
C3: library part c0026, "=Описание", HelpURL=https://www.yageo.com/upload/media/product/productsearch/datasheet/mlcc/UPY-GPHC_X5R_4V-to-50V_26.pdf, id=c0026, Корпус=0603, Наименование=CC0603KRX5R9BB225, Напряжение="50 В", Номинал="2,2 мк", Номинальное напряжение="50 В", Описание="Конденсатор чип 0603 2,2 мкФ 50 В ±10 %", Отклонение="±10 %", Производитель="YAGEO Corp.", Рабочие температуры="от -55 °С до +85 °С", Фамилия=Самарин
C4: library part c0021, "=Описание", HelpURL=https://www.yageo.com/upload/media/product/products/datasheet/mlcc/UPY-GPHC_X7R_6.3V-to-50V_20.pdf, id=c0021, Корпус=0603, Наименование=CC0603JRX7R9BB224, Напряжение="50 В", Номинал="0,22 мк", Номинальное напряжение="50 В", Описание="Конденсатор чип 0603 0,22 мкФ 50 В ±5 %", Отклонение="±5 %", Производитель="YAGEO Corp.", Рабочие температуры="от -55 °С до +125 °С", Фамилия=Самарин
C5 C8 C9 C10 C11: library part c0040, "=Описание", HelpURL=https://www.vishay.com/capacitors/list/product-40002/, id=c0040, Корпус=1206, Наименование=293D105X9025A2TE3, Напряжение="25 В", Номинал="1 мк", Номинальное напряжение="25 В", Описание="Конденсатор чип 1206 1 мкФ 25 В ±10 % полярный", Отклонение="±10 %", Производитель="Vishay Intertechnology, Inc.", Рабочие температуры="от -55 °С до +125 °С", Фамилия=Ларионов
C7: library part c0039, "=Описание", HelpURL=https://www.vishay.com/capacitors/list/product-40002/, id=c0039, Корпус=1206, Наименование=293D104X9050A2TE3, Напряжение="25 В", Номинал="0,1 мк", Номинальное напряжение="50 В", Описание="Конденсатор чип 1206 0,1 мкФ 50 В ±10 % полярный", Отклонение="±10 %", Производитель="Vishay Intertechnology, Inc.", Рабочие температуры="от -55 °С до +125 °С", Фамилия=Ларионов
DD1: library part dd0005, "=Описание", HelpURL=https://www.microchip.com/wwwproducts/en/MCP2221A, id=dd0005, Корпус="QFN-16 (4 x 4)", Наименование=MCP2221A-I/ML, Описание="Преобразователь USB-I2C/UART", Производитель="Microchip Technology Inc.", Фамилия=Паньков
DD2: library part dd0007, "=Описание", HelpURL=https://www.ti.com/product/MAX232?dcmp=dsproject&hqs=pf, id=dd0007, Корпус=SOIC-16, Наименование=MAX232DR, Описание="Приемопередатчик RS-232", Производитель="Texas Instruments", Фамилия=Паньков
HL1 HL2 HL3: library part hl0001, "=Описание", HelpURL=https://www.vishay.com/leds/list/product-83172/, id=hl0001, Корпус=0603, Наименование=TLMS1000-GS08, Номинальная длина волны="628 нм", Номинальная сила света="4 мкд", Номинальное падение напряжения="1,8 В", Номинальный прямой ток="15 мА", Описание="Светодиод чип 0603 красный", Производитель="Vishay Intertechnology, Inc.", Рабочие температуры="от -40 °С до +100 °С", Рассеиваемая мощность="40 мВт", Фамилия=Ларионов, Цвет=Red
L1: library part l0002, "=Описание", HelpURL=https://www.murata.com/en-global/products/productdetail?partno=BLM18PG221SN1%23, id=l0002, Корпус=0603, Наименование=BLM18PG221SN1D, Описание="Ферритовая бусина 220 Ом ±25 %", Отклонение, 100 Мгц="±25 %", Производитель="Murata Manufacturing Co., Ltd.", Рабочие температуры="от -55 °С до +125 °С", Сопротивление, 100 МГц="220 Ом", Сопротивление при постоянном токе="0,1 Ом", Фамилия=Самарин
R1 R2 R3: library part r0007, "=Описание", HelpURL=https://www.yageo.com/upload/media/product/productsearch/datasheet/rchip/PYu-RC_Group_51_RoHS_L_11.pdf, id=r0007, Корпус=0603, Наименование=RC0603FR-07220RL, Номинал=220, Номинальное напряжение="75 В", Номинальный ток="1 А", Описание="Резистор чип 0603 220 Ом ±1 % 0,1 Вт", Отклонение="±1 %", Производитель=Yageo, Рабочие температуры="от -55 °С до +155 °С", Фамилия=Ларионов
R4: library part r0012, "=Описание", HelpURL=https://www.yageo.com/upload/media/product/productsearch/datasheet/rchip/PYu-RC_Group_51_RoHS_L_11.pdf, id=r0012, Корпус=0603, Наименование=RC0603FR-0710KL, Номинал="10 к", Номинальное напряжение="75 В", Номинальный ток="1 А", Описание="Резистор чип 0603 10 кОм ±1 % 0,1 Вт", Отклонение="±1 %", Производитель=Yageo, Рабочие температуры="от -55 °С до +155 °С", Фамилия=Самарин
R5 R6: library part r0003, "=Описание", HelpURL=https://www.yageo.com/upload/media/product/productsearch/datasheet/rchip/PYu-RC_Group_51_RoHS_L_11.pdf, id=r0003, Корпус=0603, Наименование=RC0603FR-0722RL, Номинал=22, Номинальное напряжение="75 В", Номинальный ток="1 А", Описание="Резистор чип 0603 22 Ом ±1 % 0,1 Вт", Отклонение="±1 %", Производитель=Yageo, Рабочие температуры="от -55 °С до +155 °С", Фамилия=Ларионов
S1: library part sw0002, "=Описание", HelpURL=https://www.te.com/usa-en/product-4-1437565-1.html, id=sw0002, Количество контактов=4, Корпус="6,00 x 6,00 x 4,98", Наименование=FSM4JSMA, Описание="Нажимная кнопка", Производитель="TE Connectivity", Промывка=Разрешена, Рабочие температуры="от –40 °С до +85 °С", Сопротивление контакта="100 мОм", Ток нагрузки="50 мА @ 24 В", Фамилия=Паньков
VD1: library part vd0007, HelpURL=https://www.ti.com/product/TPD2E001, id=vd0007, Корпус=SOP-4, Наименование=TPD2E001DZDR, Описание="Диодная сборка для подавления помех, 5 В", Производитель="Texas Instruments", Фамилия=Паньков
VD2 VD3: library part vd0002, "=Описание", HelpURL=https://www.littelfuse.com/products/tvs-diode-arrays/general-purpose-esd-protection/sdc/sd12c_01ftg.aspx, id=vd0002, Корпус=SOD323, Наименование=SD12C-01FTG, Описание="Двунаправленная диодная сборка для подавления помех, 12 В", Производитель="Littelfuse, Inc.", Фамилия=Ларионов
X1: library part x0001, "=Описание", Contact_1=VBUS, Contact_2=D-, Contact_3=D+, Contact_4=ID, Contact_5=GND, HelpURL=https://www.te.com/global-en/product-2108877-1.html, id=x0001, Наименование=2108877-1, Описание="Micro USB Type B IP68 гнездо", Производитель="TE Connectivity", Фамилия=Ларионов
X2: library part x0002, "=Описание", Contact_1=CD, Contact_2=TX, Contact_3=RX, Contact_4=DTR, Contact_5=GND, Contact_6=DSR, Contact_7=CTS, Contact_8=RTS, Contact_9=RI, HelpURL=https://www.te.com/global-en/product-1-1740194-2.html, id=x0002, Наименование=1-1740194-2, Описание="D-Sub 9 pin 2,74 мм гнездо", Производитель="TE Connectivity", Фамилия=Ларионов

## Free pads (board coordinates)
  round 3.3 hole 1.6: 3(2.5,2.5) 3(2.5,31.5)

## Via types
v1: diameter 0.6, hole 0.3, Top Layer to Bottom Layer, tented both sides, 62 vias
v2: diameter 0.6, hole 0.3, Top Layer to Signal Layer 2, tented both sides, 17 vias
v3: diameter 0.6, hole 0.3, Top Layer to Bottom Layer, 9 vias

## Nets (pads, with @x,y where several pads share a name; then routed paths per layer and width w, separated by ;. In a path a pad name is that pad's centre, name@x,y a point inside that pad or via, vN(x,y) a via of type N, cw(c..) or ccw(c..) an arc to the next point about the centre after c; other vN are vias at no path point)
+5В: C2.1 C5.1 C7.1 DD1.16 DD2.16 L1.2 R1.1 R2.1 R3.1 R4.1 | length 1.9
  Top Layer w0.15: R4.1 v2(42.6,10.5)
  Top Layer w0.3: C2.1@17.15,10.625 17.5,10.275 C2.1
  other v2: 23.5,8.7 25.3,8.7 27.3,8.7 29.2,8.7 31,8.7 18.6,9.9 18.6,10.8 25.1,14.7 25.9,14.7 26.7,14.7 15.4,18.9 16.2,18.9 16.9,19.6 16.9,20.4 15.4,21.1 16.2,21.1
CN_5V_IN: C1.1 L1.1 VD1.4 X1.1 | length 14.3
  Top Layer w0.15: X1.1@5.946,19.6 X1.1@6.021,19.525
  Top Layer w0.3: X1.1@5.946,19.6 7.2,19.6 7.6,20 7.6,22 7.9,22.3 C1.1 9.3,21.4 ; VD1.4 8.4,19.975 8.4,20.9 8.6,21.1 9,21.1 9.3,21.4 ; L1.1 12.3,20 10.9,21.4 9.3,21.4
GND: C1.2 C2.2 C3.2 C4.2 C5.2 C6.2 C7.2 C8.2 C9.2 DD1.0 DD1.13 DD2.15 HL1.1 pad.3 S1.1 VD1.1 VD2.1 VD3.1 X1.5 X1.TP1 X2.5 X2.TP1
  other v1: 5,1 10,1 15,1 20,1 25.4,1 29.1,1 50,1 38,1.25 40.5,1.25 43,1.25 34.75,3.75 38,5 40.5,5 43,5 2.5,5.5 7.5,5.5 12.5,5.5 17.5,5.5 47.5,5.5 5,10 10,10 45,10 20,11.25 25,11.25 30,11.25 35,11.25 22.5,15.5 32.5,15.5 42.5,19.5 47.5,19.5 5,24 15,24 40,24 45,24 2.5,28.5 7.5,28.5 12.5,28.5 17.5,28.5 42.5,28.5 47.5,28.5 5,33 10,33 15,33 20,33 25,33 30,33 35,33 40,33 45,33 50,33
  other v3: 14.1,13.85 15,13.85 15.9,13.85 14.1,14.75 15,14.75 15.9,14.75 14.1,15.65 15,15.65 15.9,15.65
LED_RX: DD1.1 HL2.1 | length 18.4
  Top Layer w0.15: DD1.1 17.825,13.775 v1(18.2,13.4) ; v1(25.4,2.5) HL2.1
  Bottom Layer w0.15: v1(18.2,13.4) 18.2,10.4 20.4,8.2 24,8.2 25.4,6.8 v1(25.4,2.5)
LED_TX: DD1.2 HL3.1 | length 22.3
  Top Layer w0.15: DD1.2 16.937,14.412 18.187,14.412 v1(18.2,14.4) ; v1(29.1,2.5) HL3.1
  Bottom Layer w0.15: v1(18.2,14.4) 19,13.6 19,10.9 20.8,9.1 26.9,9.1 29.1,6.9 v1(29.1,2.5)
NetC3_1: C3.1 C4.1 DD1.10 | length 14.3
  Top Layer w0.15: v1(11.3,10.2) C4.1 C3.1 ; v1(12.45,17.5) 12.45,15.45 12.825,15.075 DD1.10
  Bottom Layer w0.15: v1(11.3,10.2) 12.45,11.35 v1(12.45,17.5)
NetC8_1: C8.1 DD2.2 | length 4.3
  Top Layer w0.15: DD2.2 33.75,22.575 34.65,23.475 34.725,23.475 35.475,24.225 C8.1
NetC9_1: C9.1 DD2.6 | length 5.5
  Top Layer w0.15: DD2.6 33.155,27.655 33.5,28 33.5,29.5 34.3,30.3 C9.1
NetC10_1: C10.1 DD2.4 | length 4.5
  Top Layer w0.15: DD2.4 33.365,25.115 35.475,27.225 C10.1
NetC10_2: C10.2 DD2.5 | length 9.1
  Top Layer w0.15: DD2.5 33.485,26.385 34.1,27 34.1,28.3 34.6,28.8 37.6,28.8 37.925,28.475 C10.2 C10.2@37.9,27.325
NetC11_1: C11.1 DD2.1 | length 3.6
  Top Layer w0.15: DD2.1 35.47,21.305 C11.1
NetC11_2: C11.2 DD2.3 | length 13.9
  Top Layer w0.15: DD2.3 31.83,23.775 30.675,23.775 30.3,23.4 30.3,20.4 30.8,19.9 37.7,19.9 37.9,20.1 37.9,21.275 C11.2
NetHL1_2: HL1.2 R1.2 | length 4.1
  Top Layer w0.15: R1.2 23.525,5.725 23.875,5.375 23.875,5.35 24.9,4.325 24.9,3.15 24.325,2.575 HL1.2
NetHL2_2: HL2.2 R2.2 | length 4
  Top Layer w0.15: R2.2@27.25,5.725 27.275,5.725 R2.2 27.65,5.375 27.65,5.35 28.675,4.325 28.675,3.15 HL2.2@28.1,2.575
NetHL3_2: HL3.2 R3.2 | length 4
  Top Layer w0.15: R3.2 31.025,5.725 31.375,5.375 31.375,5.35 32.4,4.325 32.4,3.15 HL3.2@31.825,2.575
NetR5_2: R5.2 X2.3 | length 7.3
  Top Layer w0.15: R5.2@45.225,17.55 R5.2 50.5,17.75 51.25,17 X2.3
NetR6_2: R6.2 X2.2 | length 7.4
  Top Layer w0.15: R6.2@45.335,13.81 R6.2 50.5,13.5 51.26,14.26 X2.2
R\S\T\: C6.1 DD1.3 R4.2 S1.2 | length 42.7
  Top Layer w0.15: DD1.3 17.783,15.075 18.108,15.4 v1(18.2,15.4) ; S1.2@35.95,5.99 S1.2@36.3,5.99 ; v1(38.4,10.5) R4.2 39.8,10.425 C6.1 38.31,8 S1.2@36.3,5.99 ; S1.2@45.05,5.99 S1.2@36.3,5.99
  Bottom Layer w0.15: v1(18.2,15.4) 19.4,15.4 22,12.8 22,10.8 21.7,10.5 v1(38.4,10.5)
RS232_RX: DD2.13 R5.1 VD2.2 | length 30
  Top Layer w0.15: DD2.13 22.615,25.1 v1(25.5,25.1) ; v1(38.75,16.5) 37.925,17.325 VD2.2 R5.1
  Bottom Layer w0.15: v1(25.5,25.1) 31,25.1 32.4,23.7 32.4,18.4 34.3,16.5 v1(38.75,16.5)
RS232_TX: DD2.14 R6.1 VD3.2 | length 30.1
  Top Layer w0.15: DD2.14 22.622,23.822 25.478,23.822 v1(25.5,23.8) ; v1(38.75,14.75) 37.925,13.925 VD3.2 R6.1
  Bottom Layer w0.15: v1(25.5,23.8) 30.1,23.8 31.1,22.8 31.1,17.7 34.1,14.7 38.7,14.7 v1(38.75,14.75)
UART_RX: DD1.4 DD2.12 | length 14.6
  Top Layer w0.15: DD1.4@17.175,15.725 DD1.4 16.9,15.75 16.9,16 19.8,18.9 19.8,25.9 20.285,26.385 DD2.12
UART_TX: DD1.5 DD2.11 | length 15.8
  Top Layer w0.15: DD1.5@15.975,16.925 DD1.5 16,16.7 16.2,16.7 18.75,19.25 18.75,26.75 19.655,27.655 DD2.11
USB_D_N: DD1.11 VD1.3 X1.2 | length 12.5
  Top Layer w0.143: X1.2 6.171,19 6.286,18.885 7.438,18.885 9.41,18.885 VD1.3@10.275,19.75 ; VD1.3 VD1.3@10.275,19.75 ; DD1.11 12.827,14.425 12.749,14.347 12.749,14.321 12.663,14.235 12.235,14.235 11.77,14.7 11.77,18.527 11.412,18.885 11.14,18.885 VD1.3@10.275,19.75
USB_D_P: DD1.12 VD1.2 X1.3 | length 12.5
  Top Layer w0.143: X1.3 6.171,18.5 6.286,18.615 7.55,18.615 9.41,18.615 VD1.2@10.275,17.75 ; VD1.2 VD1.2@10.275,17.75 ; DD1.12 12.827,13.775 12.749,13.853 12.749,13.879 12.663,13.965 12.123,13.965 11.5,14.588 11.5,18.415 11.3,18.615 11.14,18.615 VD1.2@10.275,17.75
pads on no net: DD1.6 DD1.7 DD1.8 DD1.9 DD1.14 DD1.15 DD2.7 DD2.8 DD2.9 DD2.10 X1.4 X2. X2.1 X2.4 X2.6 X2.7 X2.8 X2.9

## Polygon pours and split planes (outlines as drawn)
no net on Board (solid): 41,40.25
GND on Top Layer "Top Layer-GND" (solid, pour order 198): 0,34 0,0 60,0 60,34
+5В on Top Layer "Top Layer-+5В 8" (solid, pour order 186): 15.8,13.25 16.825,13.25 16.825,11.85 17.4,11.275 19,11.275 19,9.475 16.625,9.475 15.8,10.3
+5В on Top Layer "Top Layer-+5В" (solid, pour order 182): 22.7,7.3 22.7,8.8 23.3,9.4 31.2,9.4 31.8,8.8 31.8,7.3
+5В on Top Layer "Top Layer-+5В 1" (solid, pour order 180): 22.7,6.5 31.8,6.5 31.8,8.1 22.7,8.1
+5В on Top Layer "Top Layer-+5В 9" (solid, pour order 184): 15,18.5 15,21.5 16.4,21.5 17.3,20.6 17.3,19.4 16.4,18.5
+5В on Top Layer "Top Layer-+5В 2" (solid, pour order 174): 21.2,22 21.2,20.6 24.3,20.6 24.3,22 26.2,22 27.1,21.1 27.1,14.2 24.6,14.2 24.6,20.3 24.3,20.6 21.2,20.6 21.2,22 26.2,22 24.8,20.6 24.3,20.6
+5В on Top Layer "Top Layer-+5В 7" (solid, pour order 168): 24.6,20.3 27.1,20.3 27.1,14.2 24.6,14.2
+5В on Top Layer "Top Layer-+5В 3" (solid, pour order 178): 21.2,22 21.2,20.6 26.2,20.6 26.2,22
+5В on Top Layer "Top Layer-+5В 6" (solid, pour order 176): 21.2,20.6 24.8,20.6 26.2,22 21.2,22
no net on Top Layer "Top Layer-+5В 4" (solid, pour order 172): 24.8,20.6 26.2,22 26.2,20.6 21.2,20.6
no net on Top Layer "Top Layer-+5В 5" (solid, pour order 170): 26.2,22 25.6,22 25.6,21.6 26.2,21.6
no net on Top Layer "Top Layer-No Net" (solid, pour order 12): 30.4,14.2
no net on Top Layer "Top Layer-No Net 1" (solid, pour order 2): 23.75,21.75
+5В on Signal Layer 2 "Signal Layer 2-+5В" (solid, pour order 190): 0,34 0,0 60,0 60,34
no net on Signal Layer 2 "Signal Layer 2-+5В 5" (solid, pour order 188): 60,0 0.1,0 0,0.1 0,0 60,0 60,34
+5В on Signal Layer 2 "Signal Layer 2-+5В 3" (solid, pour order 22): 9.25,7.5
+5В on Signal Layer 2 "Signal Layer 2-+5В 4" (solid, pour order 18): 14.75,42
GND on Bottom Layer "Bottom Layer-GND" (solid, pour order 192): 0,34 0,0 60,0 60,34
GND on Signal Layer 1 "Signal Layer 1-GND" (solid, pour order 194): 0,34 0,0 60,0 60,34

## Silkscreen, mask and mechanical layers (free items; w line width, h text height)
Top Overlay:
  text ".designation" at 3.5,2 h2
  text "PWR" at 22.25,0.5 h1.2
  text "RX" at 26,0.5 h1.2
  text "TX" at 29.75,0.5 h1.2
Bottom Overlay:
  text ".pcb_dec_number" at 19.75,2 h2
Board:
  the board outline again, w0.254
Assembly Notes (Mech5):
  text "'.title'" at 0,-2.25 h2
  text "'.project'_'.pcb_dec_number'['.Pcb_File_Name_No_Path']" at 0,-5 h2